# Altium PCB PCB_ProtoDuck_v1_2026-05-04.pcbdoc (part 2 of 2)
Units mm, origin at the board's own origin, x right, y up, seen from the top; angles counter-clockwise.
Board outline 75.65 x 110.65 mm, 2 copper layers (Top Layer, Bottom Layer); 76 components, 84 nets, 372 pads, 186 vias.
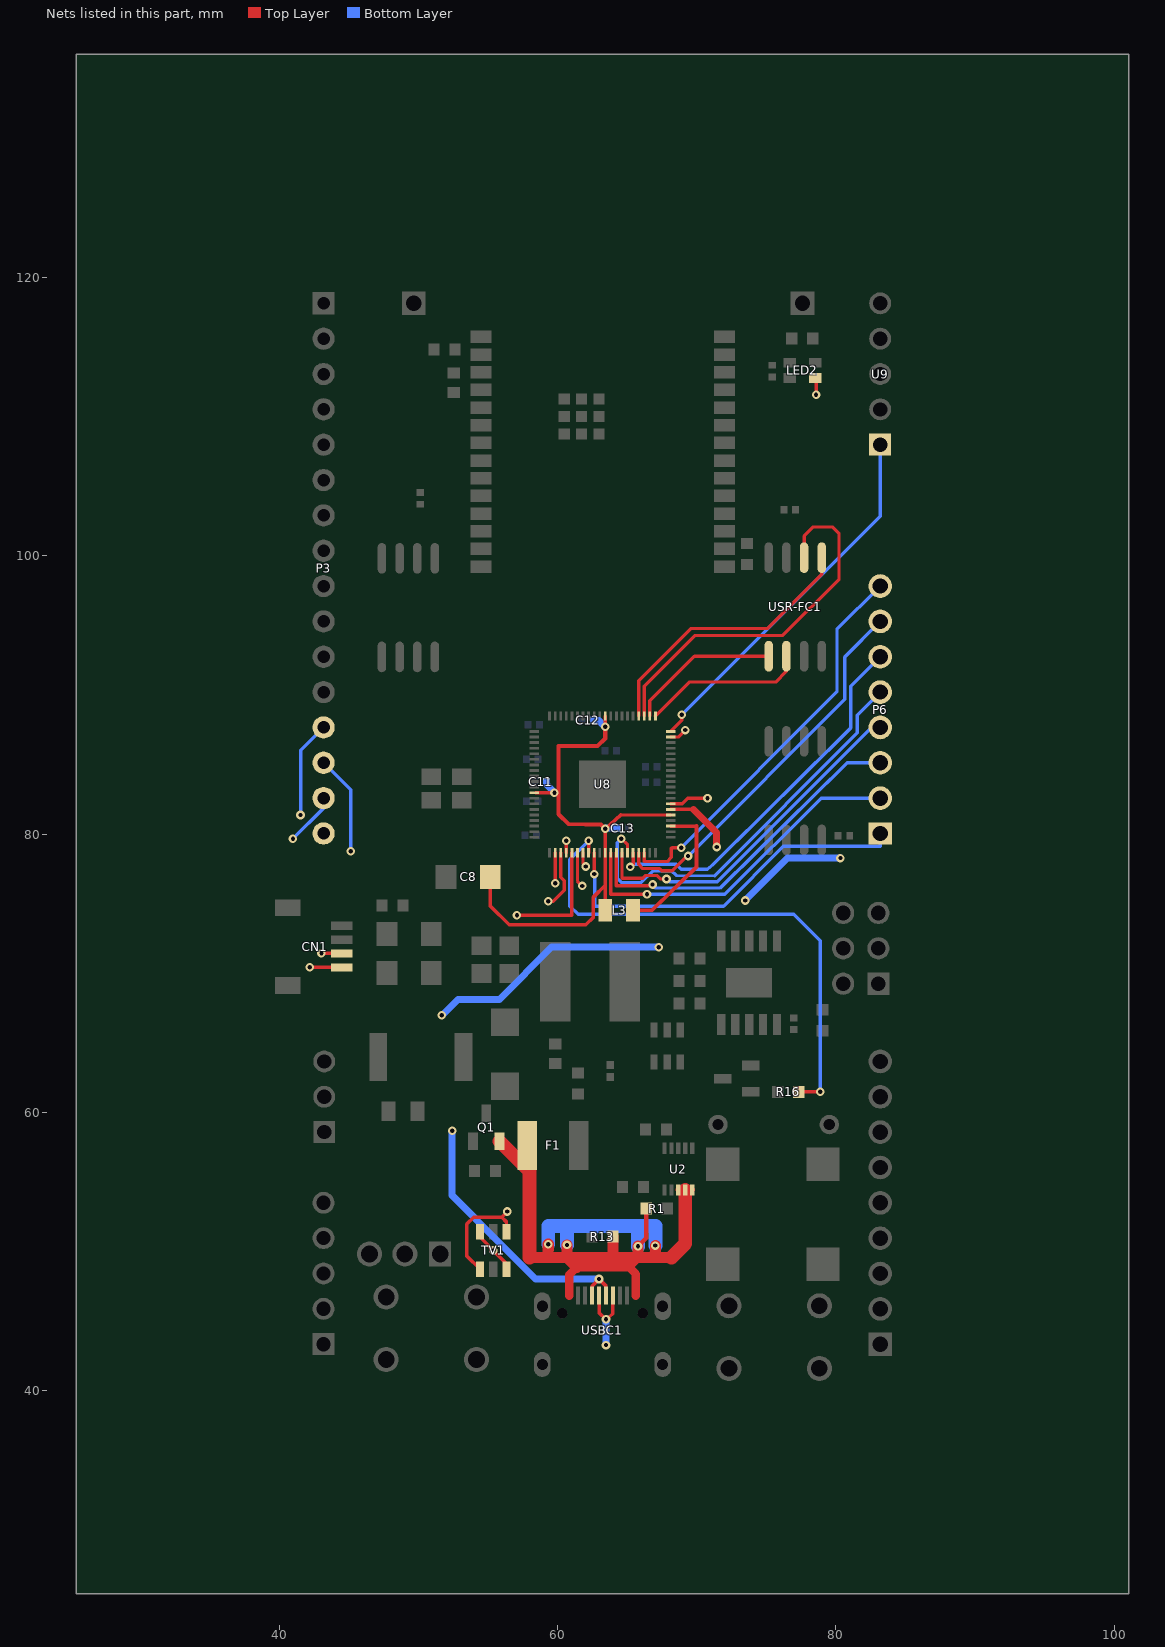
[diagram p2: the nets of this part, all layers, seen from the top]

## Via types
v1: diameter 0.62, hole 0.31, Top Layer to Bottom Layer, tented both sides, 174 vias
v2: diameter 0.5, hole 0.3, Top Layer to Bottom Layer, tented both sides, 12 vias

## Nets (pads, with @x,y where several pads share a name; then routed paths per layer and width w, separated by ;. In a path a pad name is that pad's centre, name@x,y a point inside that pad or via, vN(x,y) a via of type N, cw(c..) or ccw(c..) an arc to the next point about the centre after c; other vN are vias at no path point) (continued)
U8_42: P3.13 U8.42 | length 30.4
  Top Layer w0.24: v1(59.827,76.477) U8.42@59.827,78.669
  Mid-Layer 1 w0.24: v1(41.527,81.377) 43.627,81.378 44.958,80.047 45.207,80.047 49.877,75.377 58.127,75.377 58.727,75.977 59.327,75.977 v1(59.827,76.477)
  Bottom Layer w0.25: v1(41.527,81.377) 41.527,86.014 P3.13@43.18,87.667
U8_43: P3.14 U8.43 | length 27.3
  Top Layer w0.24: v1(59.327,75.177) 59.677,75.177 60.477,75.977 60.477,76.652 60.227,76.902 U8.43@60.227,78.669
  Mid-Layer 1 w0.24: v1@45.127,78.777 45.827,78.777 49.677,74.927 59.077,74.927 v1(59.327,75.177)
  Bottom Layer w0.25: P3.14@43.18,85.127 45.127,83.18 v1@45.127,78.777
  other v1: 45.127,78.777
U8_44: P3.15 U8.44 | length 33.7
  Top Layer w0.24: U8.44@60.627,78.669 v1(60.627,79.527)
  Mid-Layer 1 w0.24: 40.977,77.127 v1(40.977,79.677) ; 40.978,77.126 43.576,77.126 47.226,73.476 59.426,73.476 60.427,74.477 60.427,79.328 v1(60.627,79.527)
  Bottom Layer w0.25: v1(40.977,79.677) 43.18,81.88 P3.15@43.18,82.587
U8_45: P3.16 U8.45 | length 25.5
  Top Layer w0.24: v1(57.077,74.177) 61.027,74.177 61.027,75.777 U8.45@61.027,78.669
  Mid-Layer 1 w0.24: P3.16@43.18,80.047 43.18,78.972 43.18,78.83 47.828,74.177 v1(57.077,74.177)
U8_46: CN1.3 U8.46 | length 26.1
  Top Layer w0.24: v1(43.027,71.427) 44.474,71.427 CN1.3@44.483,71.418 ; U8.46@61.427,78.669 61.427,76.627 v1(61.777,76.277)
  Mid-Layer 1 w0.24: v1(43.027,71.427) 59.177,71.427 61.777,74.077 61.777,74.127 v1(61.777,76.277)
U8_47: CN1.4 U8.47 | length 29.2
  Top Layer w0.24: v1(42.177,70.427) 44.474,70.427 CN1.4@44.483,70.419 ; U8.47@61.827,78.669 61.827,77.877 v1(62.027,77.677)
  Mid-Layer 1 w0.24: v1(42.177,70.427) 58.976,70.428 62.476,73.928 62.476,76.478 62.477,76.477 61.928,76.976 61.928,77.677 v1(62.027,77.677)
U8_48: R16.2 U8.48 | length 37.5
  Top Layer w0.25: U8.48@62.227,78.669 v1(62.227,79.527) ; R16.2@77.33,61.477 v1(78.877,61.477)
  Bottom Layer w0.25: v1(62.227,79.527) 60.876,78.176 60.876,74.827 61.478,74.228 76.977,74.228 78.877,72.328 v1@78.877,61.477
U8_49: P6.1 U8.49 | length 27.1
  Top Layer w0.24: v1(62.627,77.127) U8.49@62.627,78.669
  Bottom Layer w0.24: v1@62.626,77.126 62.677,77.078 62.677,74.827 71.928,74.827 76.228,79.127 83.185,79.127 P6.1@83.185,80.047
U8_52: P6.2 U8.52 | length 25.2
  Top Layer w0.24: U8.52@63.827,78.669 63.827,75.677 v1(66.427,75.677)
  Bottom Layer w0.24: v1(66.427,75.677) 72.027,75.678 78.938,82.587 P6.2@83.185,82.587
U8_53: P6.3 U8.53 | length 25.2
  Top Layer w0.24: U8.53@64.227,78.669 64.227,76.277 66.827,76.277 v1(66.827,76.377)
  Bottom Layer w0.24: v1(66.827,76.377) v1@67.028,76.176 ; 67.028,76.128 71.676,76.128 80.828,85.127 P6.3@83.185,85.127
U8_54: P6.4 U8.54 | length 25.3
  Top Layer w0.24: U8.54@64.627,78.669 64.627,76.827 66.127,76.827 66.327,77.027 67.127,77.027 67.377,76.777 v1(67.827,76.777)
  Bottom Layer w0.24: v1(67.827,76.777) 68.027,76.577 71.477,76.577 82.567,87.667 P6.4@83.185,87.667
U8_55: P6.5 U8.55 | length 29.9
  Top Layer w0.24: v1(64.577,79.677) 65.027,79.227 U8.55@65.027,78.669
  Bottom Layer w0.24: v1@64.577,79.676 64.277,79.376 64.277,76.826 64.577,76.526 66.027,76.526 66.878,77.377 68.176,77.377 68.527,77.027 71.275,76.989 81.526,87.276 ; 81.527,87.277 81.527,88.549 P6.5@83.185,90.207
U8_56: P6.6 U8.56 | length 27.4
  Top Layer w0.24: v1@65.227,77.627 v1(65.227,77.642) 65.427,77.842 U8.56@65.427,78.669
  Bottom Layer w0.24: v1(65.227,77.642) 65.413,77.827 68.527,77.827 68.877,77.476 70.777,77.477 71.177,77.827 81.077,87.626 81.077,90.639 P6.6@83.185,92.747
U8_57: P6.7 U8.57 | length 27.6
  Top Layer w0.24: U8.57@65.827,78.669 65.827,77.827 66.127,77.527 67.327,77.527 67.477,77.377 68.227,77.377 69.277,78.427 v1(69.377,78.427)
  Bottom Layer w0.24: v1@69.378,78.426 80.627,89.676 80.627,92.729 P6.7@83.185,95.287
U8_58: P6.8 U8.58 | length 28.8
  Top Layer w0.24: 66.227,78.027 67.877,78.027 68.178,78.328 68.178,78.977 68.228,79.027 v1(68.877,79.027) ; 66.226,78.035 U8.58@66.226,78.678
  Bottom Layer w0.24: v1@68.877,79.028 80.076,90.227 80.076,94.718 P6.8@83.185,97.827
U8_63: L3.2 U8.63 | length 10.6
  Top Layer w0.24: U8.63@68.135,80.577 69.977,80.577
  Top Layer w0.27: L3.2@65.427,74.527 66.777,74.527 69.977,77.626 69.977,80.578
U8_65: C8.2 C11.1 C12.1 C13.1 L3.1 U8.10 U8.32 U8.51 U8.65 | length 42.4
  Top Layer w0.24: U8.51@63.427,78.669 v1(63.426,80.377) ; v1@63.426,87.878 U8.10@63.427,88.484 ; 64.526,81.378 U8.65@68.135,81.377
  Top Layer w0.25: C8.2@55.169,76.927 55.176,74.827 56.527,73.477 62.027,73.477 62.577,74.027 62.577,75.477 63.427,76.327 63.427,76.898 ; U8.32@58.419,82.978 v1(59.772,82.976) v1@60.077,82.975 ; L3.1@63.427,74.977 63.427,77.483 U8.51@63.427,78.677
  Top Layer w0.26: v1(63.426,80.377) 64.526,81.378
  Top Layer w0.3: v1(63.426,80.377) 63.127,80.677 60.777,80.727 60.076,81.429 60.076,86.326 62.878,86.326 63.426,86.877 v1@63.426,87.878
  Bottom Layer w0.5: C11.1@59.197,83.777 59.197,83.551 v1(59.772,82.976) ; C12.1@62.597,88.177 62.959,88.177 v1(63.426,87.71) ; v1(63.426,80.377) 63.476,80.427 C13.1@64.257,80.427
U8_79: LED2.3 U8.79 | length 37.8
  Top Layer w0.24: U8.79@68.135,86.977 68.677,86.977 v1(69.177,87.477) ; LED2.3@78.513,112.772 78.577,112.708 v1(78.577,111.577)
  Mid-Layer 1 w0.24: v1(69.177,87.477) 69.576,87.878 69.576,111.827 71.628,113.877 73.576,113.877 75.877,111.576 v1(78.577,111.577)
U8_80: U8.80 U9.1 | length 26.8
  Top Layer w0.24: U8.80@68.135,87.377 68.927,88.169 v1(68.927,88.577)
  Bottom Layer w0.24: v1(68.927,88.577) 83.185,102.835 U9.1@83.185,107.987
USBC1_A4B9: F1.1 Q1.2 R1.2 R13.2 U2.3 U2.4 U2.5 | length 61.6
  Top Layer w0.3: v1(65.776,50.377) 66.374,50.975 R1.2@66.374,53.077
  Top Layer w0.4: U2.3@68.682,54.427 U2.4@69.177,54.427 U2.5@69.677,54.427
  Top Layer w0.6: 60.828,46.834 60.828,48.327 61.377,48.876 65.128,48.876 ; 65.629,46.834 65.629,48.376 65.128,48.876 ; 65.804,49.577 65.128,48.876
  Top Layer w0.8: 57.977,49.577 60.676,49.577 ; 59.306,49.577 v1(59.327,50.527) ; v1(60.678,50.476) 60.676,49.577 ; 61.377,48.876 60.676,49.577 ; R13.2@63.98,51.077 63.98,49.655 64.058,49.577 ; v1(65.776,50.377) 65.801,49.577 ; 67.015,49.577 v1(67.028,50.428) ; 68.176,49.577 60.676,49.577
  Top Layer w1: Q1.2@55.827,57.927 57.977,55.777 ; F1.1@57.824,57.627 57.824,55.93 57.977,55.777 ; 57.977,49.577 57.977,55.777 ; 68.176,49.577 69.177,50.578 U2.4@69.177,54.427
  Bottom Layer w1: v1(59.327,50.527) 59.327,51.827 ; v1(60.678,50.476) 60.678,51.825 59.327,51.827 ; v1(65.776,50.377) 65.776,51.827 67.028,51.825 ; v1(67.028,50.428) 67.028,51.825 ; 59.327,51.827 67.028,51.825
USBC1_A6: TV1.1 TV1.4 U8.67 USBC1.A6 USBC1.B6 | length 95.2
  Top Layer w0.24: U8.67@68.135,82.177 68.948,82.177 69.348,82.577 v1(70.777,82.577)
  Top Layer w0.25: TV1.1@54.427,48.727 53.477,49.677 53.477,51.977 53.977,52.477 55.977,52.477 ; TV1.4@56.327,51.427 56.327,52.127 55.977,52.477 ; v1(56.377,52.877) 55.977,52.477 ; USBC1.A6@62.977,46.834 62.977,45.577 63.477,45.127 63.977,45.527 USBC1.B6@63.977,46.834
  Mid-Layer 1 w0.25: v1(56.377,52.877) 56.377,52.227 v1@63.477,45.127
  Mid-Layer 1 w0.5: v1(63.477,43.277) 58.277,43.277 56.927,44.627 56.927,47.327 54.527,49.727 54.527,53.977 58.477,57.927 58.477,63.377 65.777,70.677 67.827,70.677 72.377,75.227 v1(73.477,75.227) ; v1(70.777,82.577) 76.027,82.577 v1(80.327,78.277)
  Bottom Layer w0.5: v1(63.477,43.277) v1(63.477,45.127) ; v1(73.477,75.227) 76.527,78.277 v1(80.327,78.277)
USBC1_B7: TV1.3 TV1.6 U8.66 USBC1.A7 USBC1.B7 | length 82
  Top Layer w0.25: TV1.6@54.427,51.427 54.427,51.027 v1(55.377,50.077) 56.327,49.127 TV1.3@56.327,48.727 ; USBC1.B7@62.477,46.834 62.477,47.527 v1(62.977,48.027) 63.477,47.527 USBC1.A7@63.477,46.834 ; U8.66@68.135,81.777 69.777,81.777
  Top Layer w0.5: 69.777,81.777 71.427,80.127 v1(71.427,79.077)
  Mid-Layer 1 w0.25: v1(55.377,50.077) 57.027,50.077 62.877,44.227 63.927,44.227 64.477,44.777 64.477,46.527 v1(62.977,48.027)
  Mid-Layer 1 w0.5: v1(51.677,66.977) 55.127,63.527 55.127,62.227 52.427,59.527 v1@52.427,58.677 ; v1(67.277,71.877) 67.277,74.927 v1(71.427,79.077)
  Bottom Layer w0.5: v1(51.677,66.977) 52.827,68.127 55.827,68.127 59.577,71.877 v1(67.277,71.877) ; v1@52.427,58.677 52.427,54.027 55.827,50.627 58.427,48.027 v1(62.977,48.027)
  other v1: 52.427,58.677
USR-FC1_1: U8.2 USR-FC1.1 | length 11
  Top Layer w0.24: U8.2@66.627,88.484 66.627,89.577 69.835,92.785 USR-FC1.1@75.172,92.785
USR-FC1_2: U8.1 USR-FC1.2 | length 11.8
  Top Layer w0.24: U8.1@67.027,88.484 69.47,90.927 75.677,90.927 76.442,91.692 USR-FC1.2@76.442,92.785
USR-FC1_5: U8.4 USR-FC1.5 | length 20.1
  Top Layer w0.24: U8.4@65.827,88.484 65.827,91.027 69.577,94.777 75.077,94.777 78.982,98.682 USR-FC1.5@78.982,99.869
USR-FC1_6: U8.3 USR-FC1.6 | length 27.1
  Top Layer w0.24: U8.3@66.227,88.484 66.228,90.626 69.878,94.276 76.177,94.276 80.226,98.327 80.226,101.576 79.728,102.076 78.377,102.076 77.727,101.426 USR-FC1.6@77.711,99.869
pads on no net: BUZZER1.3 BUZZER1.4 LED2.1 RST.2 RST.3 TV1.5 U1.4 U1.5 U2.1 U2.10 U3.5 U6.4 U6.5 U6.6 U6.7 U6.8 U6.9 U6.10 U6.11 U6.12 U6.13 U6.14 U6.16 U6.17 U6.18 U6.19 U6.20 U6.21 U6.22 U6.23 U6.26 U6.27 USBC1. USBC1.A8 USBC1.B8 USR-FLASH.2 USR-FLASH.3
copper on no net:
  other v1: 85.977,120.927 85.877,121.277

## Polygon pours and split planes (outlines as drawn)
GND on Internal Plane 2 (split plane): 249 vertices, not listed, extent 38.227,38.227 88.227,123.227
GND on Internal Plane 2 (split plane): 95 vertices, not listed, extent 64.514,40.015 65.44,40.939
GND on Internal Plane 2 (split plane): 95 vertices, not listed, extent 61.514,40.065 62.44,40.989
GND on Internal Plane 2 (split plane): 144 vertices, not listed, extent 71.263,40.549 73.368,42.654
GND on Internal Plane 2 (split plane): 20 vertices, not listed, extent 77.864,40.651 78.365,41.152
GND on Internal Plane 2 (split plane): 19 vertices, not listed, extent 79.265,40.651 79.766,41.152
GND on Internal Plane 2 (split plane): 43 vertices, not listed, extent 59.202,40.898 59.637,41.436
GND on Internal Plane 2 (split plane): 43 vertices, not listed, extent 58.167,40.898 58.602,41.436
GND on Internal Plane 2 (split plane): 43 vertices, not listed, extent 67.852,40.898 68.287,41.436
GND on Internal Plane 2 (split plane): 43 vertices, not listed, extent 66.817,40.898 67.252,41.436
GND on Internal Plane 2 (split plane): 144 vertices, not listed, extent 46.625,41.184 48.73,43.289
GND on Internal Plane 2 (split plane): 20 vertices, not listed, extent 53.226,41.286 53.727,41.787
GND on Internal Plane 2 (split plane): 19 vertices, not listed, extent 54.627,41.286 55.128,41.787
GND on Internal Plane 2 (split plane): 19 vertices, not listed, extent 79.265,42.052 79.766,42.553
GND on Internal Plane 2 (split plane): 20 vertices, not listed, extent 77.864,42.052 78.365,42.553
GND on Internal Plane 2 (split plane): 43 vertices, not listed, extent 59.202,42.336 59.637,42.873
GND on Internal Plane 2 (split plane): 43 vertices, not listed, extent 58.167,42.336 58.602,42.873
GND on Internal Plane 2 (split plane): 43 vertices, not listed, extent 67.852,42.336 68.287,42.873
GND on Internal Plane 2 (split plane): 43 vertices, not listed, extent 66.817,42.336 67.252,42.873
GND on Internal Plane 2 (split plane): 34 vertices, not listed, extent 83.61,42.34 84.185,42.915
GND on Internal Plane 2 (split plane): 34 vertices, not listed, extent 82.185,42.34 82.76,42.915
GND on Internal Plane 2 (split plane): 121 vertices, not listed, extent 42.243,42.406 44.117,44.281
GND on Internal Plane 2 (split plane): 19 vertices, not listed, extent 54.627,42.687 55.128,43.188
GND on Internal Plane 2 (split plane): 20 vertices, not listed, extent 53.226,42.687 53.727,43.188
GND on Internal Plane 2 (split plane): 95 vertices, not listed, extent 63.014,42.815 63.939,43.739
GND on Internal Plane 2 (split plane): 34 vertices, not listed, extent 83.61,43.765 84.185,44.34
GND on Internal Plane 2 (split plane): 34 vertices, not listed, extent 82.185,43.765 82.76,44.34
GND on Internal Plane 2 (split plane): 95 vertices, not listed, extent 63.014,44.665 63.939,45.589
GND on Internal Plane 2 (split plane): 136 vertices, not listed, extent 42.24,44.944 44.12,46.824
GND on Internal Plane 2 (split plane): 20 vertices, not listed, extent 83.61,44.972 84.093,45.455
GND on Internal Plane 2 (split plane): 19 vertices, not listed, extent 82.277,44.972 82.76,45.455
GND on Internal Plane 2 (split plane): 46 vertices, not listed, extent 59.202,44.978 59.645,45.565
GND on Internal Plane 2 (split plane): 46 vertices, not listed, extent 58.159,44.978 58.602,45.565
GND on Internal Plane 2 (split plane): 46 vertices, not listed, extent 67.852,44.978 68.295,45.565
GND on Internal Plane 2 (split plane): 46 vertices, not listed, extent 66.809,44.978 67.252,45.565
GND on Internal Plane 2 (split plane): 102 vertices, not listed, extent 65.6,45.038 66.654,46.093
GND on Internal Plane 2 (split plane): 102 vertices, not listed, extent 59.8,45.038 60.855,46.093
GND on Internal Plane 2 (split plane): 144 vertices, not listed, extent 77.763,45.049 79.867,47.154
GND on Internal Plane 2 (split plane): 144 vertices, not listed, extent 71.263,45.049 73.368,47.154
GND on Internal Plane 2 (split plane): 144 vertices, not listed, extent 53.125,45.684 55.229,47.789
GND on Internal Plane 2 (split plane): 144 vertices, not listed, extent 46.625,45.684 48.73,47.789
GND on Internal Plane 2 (split plane): 20 vertices, not listed, extent 83.61,46.305 84.093,46.788
GND on Internal Plane 2 (split plane): 19 vertices, not listed, extent 82.277,46.305 82.76,46.788
GND on Internal Plane 2 (split plane): 46 vertices, not listed, extent 59.202,46.565 59.645,47.153
GND on Internal Plane 2 (split plane): 46 vertices, not listed, extent 58.159,46.565 58.602,47.153
GND on Internal Plane 2 (split plane): 46 vertices, not listed, extent 67.852,46.565 68.295,47.153
GND on Internal Plane 2 (split plane): 46 vertices, not listed, extent 66.809,46.565 67.252,47.153
GND on Internal Plane 2 (split plane): 136 vertices, not listed, extent 42.24,47.484 44.12,49.364
GND on Internal Plane 2 (split plane): 20 vertices, not listed, extent 83.61,47.512 84.093,47.995
GND on Internal Plane 2 (split plane): 19 vertices, not listed, extent 82.277,47.512 82.76,47.995
GND on Internal Plane 2 (split plane): 95 vertices, not listed, extent 62.514,47.565 63.44,48.489
GND on Internal Plane 2 (split plane): 144 vertices, not listed, extent 47.97,48.768 50.075,50.873
GND on Internal Plane 2 (split plane): 121 vertices, not listed, extent 50.625,48.771 52.499,50.871
GND on Internal Plane 2 (split plane): 20 vertices, not listed, extent 83.61,48.845 84.093,49.328
GND on Internal Plane 2 (split plane): 19 vertices, not listed, extent 82.277,48.845 82.76,49.328
GND on Internal Plane 2 (split plane): 20 vertices, not listed, extent 45.531,48.869 46.032,49.371
GND on Internal Plane 2 (split plane): 19 vertices, not listed, extent 46.932,48.87 47.433,49.371
GND on Internal Plane 2 (split plane): 95 vertices, not listed, extent 54.915,49.615 55.84,50.539
GND on Internal Plane 2 (split plane): 95 vertices, not listed, extent 65.313,49.915 66.238,50.839
GND on Internal Plane 2 (split plane): 95 vertices, not listed, extent 66.566,49.966 67.491,50.89
GND on Internal Plane 2 (split plane): 95 vertices, not listed, extent 60.216,50.014 61.141,50.938
GND on Internal Plane 2 (split plane): 136 vertices, not listed, extent 42.24,50.024 44.12,51.904
GND on Internal Plane 2 (split plane): 20 vertices, not listed, extent 83.61,50.052 84.093,50.535
GND on Internal Plane 2 (split plane): 19 vertices, not listed, extent 82.277,50.052 82.76,50.535
GND on Internal Plane 2 (split plane): 95 vertices, not listed, extent 58.864,50.065 59.789,50.989
GND on Internal Plane 2 (split plane): 19 vertices, not listed, extent 46.932,50.271 47.433,50.772
GND on Internal Plane 2 (split plane): 20 vertices, not listed, extent 45.531,50.271 46.032,50.772
GND on Internal Plane 2 (split plane): 20 vertices, not listed, extent 83.61,51.385 84.093,51.868
GND on Internal Plane 2 (split plane): 19 vertices, not listed, extent 82.277,51.385 82.76,51.868
GND on Internal Plane 2 (split plane): 95 vertices, not listed, extent 55.915,52.415 56.84,53.339
GND on Internal Plane 2 (split plane): 136 vertices, not listed, extent 42.24,52.564 44.12,54.444
GND on Internal Plane 2 (split plane): 20 vertices, not listed, extent 83.61,52.592 84.093,53.075
GND on Internal Plane 2 (split plane): 19 vertices, not listed, extent 82.277,52.592 82.76,53.075
GND on Internal Plane 2 (split plane): 95 vertices, not listed, extent 62.014,53.065 62.939,53.989
GND on Internal Plane 2 (split plane): 20 vertices, not listed, extent 83.61,53.925 84.093,54.408
GND on Internal Plane 2 (split plane): 19 vertices, not listed, extent 82.277,53.925 82.76,54.408
GND on Internal Plane 2 (split plane): 20 vertices, not listed, extent 83.61,55.132 84.093,55.615
GND on Internal Plane 2 (split plane): 19 vertices, not listed, extent 82.277,55.132 82.76,55.615
GND on Internal Plane 2 (split plane): 20 vertices, not listed, extent 83.61,56.465 84.093,56.948
GND on Internal Plane 2 (split plane): 19 vertices, not listed, extent 82.277,56.465 82.76,56.948
GND on Internal Plane 2 (split plane): 121 vertices, not listed, extent 42.29,57.646 44.164,59.521
GND on Internal Plane 2 (split plane): 20 vertices, not listed, extent 83.61,57.672 84.093,58.155
GND on Internal Plane 2 (split plane): 19 vertices, not listed, extent 82.277,57.672 82.76,58.155
GND on Internal Plane 2 (split plane): 95 vertices, not listed, extent 51.964,58.215 52.889,59.139
GND on Internal Plane 2 (split plane): 129 vertices, not listed, extent 78.674,58.274 80.379,59.979
GND on Internal Plane 2 (split plane): 129 vertices, not listed, extent 70.674,58.274 72.379,59.979
GND on Internal Plane 2 (split plane): 307 vertices, not listed, extent 68.714,58.615 69.639,62.089
GND on Internal Plane 2 (split plane): 20 vertices, not listed, extent 83.61,59.005 84.093,59.488
GND on Internal Plane 2 (split plane): 19 vertices, not listed, extent 82.277,59.005 82.76,59.488
GND on Internal Plane 2 (split plane): 136 vertices, not listed, extent 42.287,60.184 44.167,62.064
GND on Internal Plane 2 (split plane): 20 vertices, not listed, extent 83.61,60.212 84.093,60.695
GND on Internal Plane 2 (split plane): 19 vertices, not listed, extent 82.277,60.212 82.76,60.695
GND on Internal Plane 2 (split plane): 95 vertices, not listed, extent 78.414,61.015 79.339,61.939
GND on Internal Plane 2 (split plane): 20 vertices, not listed, extent 83.61,61.545 84.093,62.028
GND on Internal Plane 2 (split plane): 19 vertices, not listed, extent 82.277,61.545 82.76,62.028
GND on Internal Plane 2 (split plane): 136 vertices, not listed, extent 42.287,62.724 44.167,64.604
GND on Internal Plane 2 (split plane): 20 vertices, not listed, extent 83.61,62.752 84.093,63.235
GND on Internal Plane 2 (split plane): 19 vertices, not listed, extent 82.277,62.752 82.76,63.235
GND on Internal Plane 2 (split plane): 95 vertices, not listed, extent 61.014,63.515 61.939,64.439
GND on Internal Plane 2 (split plane): 20 vertices, not listed, extent 83.61,64.085 84.093,64.568
GND on Internal Plane 2 (split plane): 19 vertices, not listed, extent 82.277,64.085 82.76,64.568
GND on Internal Plane 2 (split plane): 95 vertices, not listed, extent 68.064,64.265 68.989,65.189
GND on Internal Plane 2 (split plane): 95 vertices, not listed, extent 58.064,64.465 58.989,65.389
GND on Internal Plane 2 (split plane): 95 vertices, not listed, extent 71.914,64.715 72.84,65.639
GND on Internal Plane 2 (split plane): 95 vertices, not listed, extent 81.033,65.465 81.958,66.389
GND on Internal Plane 2 (split plane): 95 vertices, not listed, extent 79.264,66.115 80.19,67.039
GND on Internal Plane 2 (split plane): 95 vertices, not listed, extent 66.064,66.415 66.989,67.339
GND on Internal Plane 2 (split plane): 95 vertices, not listed, extent 51.215,66.515 52.14,67.439
GND on Internal Plane 2 (split plane): 95 vertices, not listed, extent 82.664,66.565 83.589,67.489
GND on Internal Plane 2 (split plane): 95 vertices, not listed, extent 77.514,67.015 78.44,67.939
GND on Internal Plane 2 (split plane): 95 vertices, not listed, extent 75.314,67.115 76.239,68.039
GND on Internal Plane 2 (split plane): 95 vertices, not listed, extent 49.265,67.174 50.19,68.098
GND on Internal Plane 2 (split plane): 95 vertices, not listed, extent 73.314,67.265 74.239,68.189
GND on Internal Plane 2 (split plane): 95 vertices, not listed, extent 57.014,67.965 57.939,68.889
GND on Internal Plane 2 (split plane): 95 vertices, not listed, extent 48.559,68.026 49.485,68.951
GND on Internal Plane 2 (split plane): 95 vertices, not listed, extent 47.215,68.044 48.14,68.969
GND on Internal Plane 2 (split plane): 95 vertices, not listed, extent 70.864,68.165 71.79,69.089
GND on Internal Plane 2 (split plane): 137 vertices, not listed, extent 79.565,68.299 81.471,70.204
GND on Internal Plane 2 (split plane): 121 vertices, not listed, extent 82.108,68.302 84.008,70.202
GND on Internal Plane 2 (split plane): 95 vertices, not listed, extent 61.414,68.914 62.339,69.839
GND on Internal Plane 2 (split plane): 95 vertices, not listed, extent 41.714,69.965 42.64,70.889
GND on Internal Plane 2 (split plane): 137 vertices, not listed, extent 79.565,70.839 81.471,72.744
GND on Internal Plane 2 (split plane): 137 vertices, not listed, extent 82.105,70.839 84.011,72.744
GND on Internal Plane 2 (split plane): 95 vertices, not listed, extent 42.565,70.965 43.49,71.889
GND on Internal Plane 2 (split plane): 95 vertices, not listed, extent 84.714,71.215 85.639,72.139
GND on Internal Plane 2 (split plane): 95 vertices, not listed, extent 66.814,71.415 67.74,72.339
GND on Internal Plane 2 (split plane): 95 vertices, not listed, extent 57.615,71.765 58.54,72.689
GND on Internal Plane 2 (split plane): 95 vertices, not listed, extent 76.204,71.854 77.129,72.779
GND on Internal Plane 2 (split plane): 95 vertices, not listed, extent 41.964,71.965 42.889,72.889
GND on Internal Plane 2 (split plane): 137 vertices, not listed, extent 79.565,73.379 81.471,75.284
GND on Internal Plane 2 (split plane): 137 vertices, not listed, extent 82.105,73.379 84.011,75.284
GND on Internal Plane 2 (split plane): 95 vertices, not listed, extent 56.615,73.715 57.54,74.639
GND on Internal Plane 2 (split plane): 95 vertices, not listed, extent 58.864,74.715 59.79,75.639
GND on Internal Plane 2 (split plane): 95 vertices, not listed, extent 73.014,74.765 73.939,75.689
GND on Internal Plane 2 (split plane): 161 vertices, not listed, extent 65.964,75.215 67.289,76.839
GND on Internal Plane 2 (split plane): 95 vertices, not listed, extent 61.314,75.815 62.239,76.739
GND on Internal Plane 2 (split plane): 95 vertices, not listed, extent 59.364,76.015 60.289,76.939
GND on Internal Plane 2 (split plane): 95 vertices, not listed, extent 67.364,76.315 68.289,77.239
GND on Internal Plane 2 (split plane): 161 vertices, not listed, extent 61.564,76.665 63.09,78.139
GND on Internal Plane 2 (split plane): 95 vertices, not listed, extent 64.764,77.18 65.69,78.104
GND on Internal Plane 2 (split plane): 95 vertices, not listed, extent 79.864,77.815 80.79,78.739
GND on Internal Plane 2 (split plane): 157 vertices, not listed, extent 68.414,77.965 69.84,79.489
GND on Internal Plane 2 (split plane): 95 vertices, not listed, extent 56.565,78.065 57.49,78.989
GND on Internal Plane 2 (split plane): 95 vertices, not listed, extent 44.664,78.315 45.589,79.239
GND on Internal Plane 2 (split plane): 95 vertices, not listed, extent 57.864,78.565 58.79,79.489
GND on Internal Plane 2 (split plane): 95 vertices, not listed, extent 70.964,78.614 71.889,79.539
GND on Internal Plane 2 (split plane): 95 vertices, not listed, extent 51.714,78.865 52.639,79.789
GND on Internal Plane 2 (split plane): 95 vertices, not listed, extent 55.964,78.865 56.889,79.789
GND on Internal Plane 2 (split plane): 95 vertices, not listed, extent 61.764,79.065 62.69,79.989
GND on Internal Plane 2 (split plane): 95 vertices, not listed, extent 60.164,79.065 61.09,79.989
GND on Internal Plane 2 (split plane): 137 vertices, not listed, extent 42.227,79.094 44.133,80.999
GND on Internal Plane 2 (split plane): 121 vertices, not listed, extent 82.185,79.109 84.185,80.984
GND on Internal Plane 2 (split plane): 95 vertices, not listed, extent 58.964,79.115 59.889,80.039
GND on Internal Plane 2 (split plane): 95 vertices, not listed, extent 40.514,79.215 41.44,80.139
GND on Internal Plane 2 (split plane): 95 vertices, not listed, extent 64.114,79.215 65.04,80.139
GND on Internal Plane 2 (split plane): 95 vertices, not listed, extent 65.614,79.315 66.539,80.239
GND on Internal Plane 2 (split plane): 95 vertices, not listed, extent 60.964,79.614 61.889,80.539
GND on Internal Plane 2 (split plane): 95 vertices, not listed, extent 62.964,79.915 63.889,80.839
GND on Internal Plane 2 (split plane): 177 vertices, not listed, extent 54.764,80.015 55.74,81.839
GND on Internal Plane 2 (split plane): 95 vertices, not listed, extent 58.664,80.515 59.589,81.439
GND on Internal Plane 2 (split plane): 95 vertices, not listed, extent 79.364,80.914 80.289,81.839
GND on Internal Plane 2 (split plane): 95 vertices, not listed, extent 41.064,80.914 41.99,81.839
GND on Internal Plane 2 (split plane): 140 vertices, not listed, extent 82.183,81.584 84.188,83.589
GND on Internal Plane 2 (split plane): 137 vertices, not listed, extent 42.227,81.634 44.133,83.539
GND on Internal Plane 2 (split plane): 173 vertices, not listed, extent 58.664,81.914 60.234,83.438
GND on Internal Plane 2 (split plane): 95 vertices, not listed, extent 54.615,82.015 55.54,82.939
GND on Internal Plane 2 (split plane): 95 vertices, not listed, extent 70.314,82.115 71.239,83.039
GND on Internal Plane 2 (split plane): 95 vertices, not listed, extent 56.014,82.115 56.939,83.039
GND on Internal Plane 2 (split plane): 95 vertices, not listed, extent 66.114,82.315 67.04,83.239
GND on Internal Plane 2 (split plane): 95 vertices, not listed, extent 56.565,83.914 57.49,84.839
GND on Internal Plane 2 (split plane): 140 vertices, not listed, extent 82.183,84.124 84.188,86.129
GND on Internal Plane 2 (split plane): 137 vertices, not listed, extent 42.227,84.174 44.133,86.079
GND on Internal Plane 2 (split plane): 95 vertices, not listed, extent 66.478,85.201 67.403,86.126
GND on Internal Plane 2 (split plane): 317 vertices, not listed, extent 55.368,85.461 57.44,88.339
GND on Internal Plane 2 (split plane): 95 vertices, not listed, extent 66.664,86.115 67.589,87.039
GND on Internal Plane 2 (split plane): 95 vertices, not listed, extent 53.064,86.264 53.99,87.189
GND on Internal Plane 2 (split plane): 95 vertices, not listed, extent 61.164,86.565 62.09,87.489
GND on Internal Plane 2 (split plane): 140 vertices, not listed, extent 82.183,86.664 84.188,88.669
GND on Internal Plane 2 (split plane): 137 vertices, not listed, extent 42.227,86.714 44.133,88.619
GND on Internal Plane 2 (split plane): 95 vertices, not listed, extent 64.964,86.795 65.889,87.72
GND on Internal Plane 2 (split plane): 241 vertices, not listed, extent 62.164,86.865 64.69,88.172
GND on Internal Plane 2 (split plane): 95 vertices, not listed, extent 68.714,87.015 69.639,87.939
GND on Internal Plane 2 (split plane): 95 vertices, not listed, extent 58.764,87.215 59.69,88.139
GND on Internal Plane 2 (split plane): 95 vertices, not listed, extent 70.214,87.914 71.14,88.839
GND on Internal Plane 2 (split plane): 95 vertices, not listed, extent 68.464,88.115 69.39,89.039
GND on Internal Plane 2 (split plane): 95 vertices, not listed, extent 56.114,88.657 57.04,89.582
GND on Internal Plane 2 (split plane): 140 vertices, not listed, extent 82.183,89.204 84.188,91.209
GND on Internal Plane 2 (split plane): 137 vertices, not listed, extent 42.227,89.254 44.133,91.159
GND on Internal Plane 2 (split plane): 95 vertices, not listed, extent 63.314,89.264 64.239,90.189
GND on Internal Plane 2 (split plane): 95 vertices, not listed, extent 58.814,89.315 59.74,90.239
GND on Internal Plane 2 (split plane): 381 vertices, not listed, extent 60.164,89.914 64.189,91.54
GND on Internal Plane 2 (split plane): 95 vertices, not listed, extent 58.064,89.964 58.989,90.889
GND on Internal Plane 2 (split plane): 95 vertices, not listed, extent 57.114,89.972 58.04,90.897
GND on Internal Plane 2 (split plane): 140 vertices, not listed, extent 82.183,91.744 84.188,93.749
GND on Internal Plane 2 (split plane): 137 vertices, not listed, extent 42.227,91.794 44.133,93.699
GND on Internal Plane 2 (split plane): 95 vertices, not listed, extent 65.764,92.614 66.69,93.539
GND on Internal Plane 2 (split plane): 95 vertices, not listed, extent 59.064,92.665 59.989,93.589
GND on Internal Plane 2 (split plane): 95 vertices, not listed, extent 64.964,93.215 65.889,94.139
GND on Internal Plane 2 (split plane): 95 vertices, not listed, extent 62.714,93.515 63.639,94.439
GND on Internal Plane 2 (split plane): 95 vertices, not listed, extent 47.915,94.015 48.84,94.939
GND on Internal Plane 2 (split plane): 140 vertices, not listed, extent 82.183,94.284 84.188,96.289
GND on Internal Plane 2 (split plane): 137 vertices, not listed, extent 42.227,94.334 44.133,96.239
GND on Internal Plane 2 (split plane): 95 vertices, not listed, extent 44.464,94.665 45.39,95.589
GND on Internal Plane 2 (split plane): 95 vertices, not listed, extent 78.464,94.865 79.39,95.789
GND on Internal Plane 2 (split plane): 95 vertices, not listed, extent 72.314,94.914 73.239,95.839
GND on Internal Plane 2 (split plane): 140 vertices, not listed, extent 82.183,96.824 84.188,98.829
GND on Internal Plane 2 (split plane): 137 vertices, not listed, extent 42.227,96.874 44.133,98.779
GND on Internal Plane 2 (split plane): 95 vertices, not listed, extent 58.014,98.115 58.939,99.039
GND on Internal Plane 2 (split plane): 95 vertices, not listed, extent 65.421,98.642 66.346,99.567
GND on Internal Plane 2 (split plane): 137 vertices, not listed, extent 42.227,99.414 44.133,101.319
GND on Internal Plane 2 (split plane): 95 vertices, not listed, extent 40.265,99.415 41.19,100.339
GND on Internal Plane 2 (split plane): 137 vertices, not listed, extent 42.227,101.954 44.133,103.859
GND on Internal Plane 2 (split plane): 95 vertices, not listed, extent 73.164,102.365 74.089,103.289
GND on Internal Plane 2 (split plane): 137 vertices, not listed, extent 42.227,104.494 44.133,106.399
GND on Internal Plane 2 (split plane): 137 vertices, not listed, extent 42.227,107.034 44.133,108.939
GND on Internal Plane 2 (split plane): 121 vertices, not listed, extent 82.247,107.049 84.122,108.924
GND on Internal Plane 2 (split plane): 137 vertices, not listed, extent 42.227,109.574 44.133,111.479
GND on Internal Plane 2 (split plane): 136 vertices, not listed, extent 82.245,109.587 84.125,111.467
GND on Internal Plane 2 (split plane): 95 vertices, not listed, extent 70.214,110.065 71.14,110.989
GND on Internal Plane 2 (split plane): 95 vertices, not listed, extent 58.271,110.142 59.196,111.067
GND on Internal Plane 2 (split plane): 95 vertices, not listed, extent 57.121,110.942 58.046,111.867
GND on Internal Plane 2 (split plane): 95 vertices, not listed, extent 78.114,111.115 79.039,112.039
GND on Internal Plane 2 (split plane): 95 vertices, not listed, extent 68.021,111.442 68.946,112.367
GND on Internal Plane 2 (split plane): 137 vertices, not listed, extent 42.227,112.114 44.133,114.019
GND on Internal Plane 2 (split plane): 136 vertices, not listed, extent 82.245,112.127 84.125,114.007
GND on Internal Plane 2 (split plane): 95 vertices, not listed, extent 47.964,113.765 48.889,114.689
GND on Internal Plane 2 (split plane): 95 vertices, not listed, extent 74.714,114.115 75.639,115.039
GND on Internal Plane 2 (split plane): 137 vertices, not listed, extent 42.227,114.654 44.133,116.559
GND on Internal Plane 2 (split plane): 136 vertices, not listed, extent 82.245,114.667 84.125,116.547
GND on Internal Plane 2 (split plane): 121 vertices, not listed, extent 48.657,117.147 50.657,119.147
GND on Internal Plane 2 (split plane): 121 vertices, not listed, extent 76.597,117.147 78.597,119.147
GND on Internal Plane 2 (split plane): 121 vertices, not listed, extent 42.23,117.197 44.13,119.097
GND on Internal Plane 2 (split plane): 136 vertices, not listed, extent 82.245,117.207 84.125,119.087
GND on Internal Plane 2 (split plane): 121 vertices, not listed, extent 85.414,120.465 86.44,121.739

## Keep-outs
Keep-Out Layer:
  lines w0.254: 38.227,41.227 ccw(c41.227,41.227) 41.227,38.227 ; 38.227,120.227 cw(c41.227,120.227) 41.227,123.227 ; 85.227,38.227 ccw(c85.227,41.227) 88.227,41.227 ; 85.227,123.227 cw(c85.227,120.227) 88.227,120.227

## Other copper
Top Layer:
  region net GND: 60.478,111.262 60.478,108.762 62.978,108.762 62.978,111.262
  rectangle: 60.477,111.227 62.977,111.277
  rectangle: 60.477,108.727 62.977,111.227
  rectangle: 60.477,108.727 62.977,111.227

## Silkscreen, mask and mechanical layers (free items; w line width, h text height)
Top Overlay:
  lines w0.254: 87.748,77.777 79.227,77.777 79.227,67.952 87.748,67.952 87.748,77.777 ; 87.748,77.777 76.977,77.777 76.977,67.977 87.748,67.977 87.748,77.777 ; 39.027,41.837 44.43,41.837 44.43,55.027 39.027,55.027 39.027,41.837 ; 39.027,57.077 44.477,57.077 44.477,65.177 39.027,65.177 39.027,57.077 ; 40.077,66.427 44.327,66.427 44.327,74.927 40.077,74.927 40.077,66.427 ; 46.223,58.68 51.43,58.68 51.43,61.474 46.223,61.474 46.223,58.68 ; 54.227,94.427 72.227,94.427 72.227,97.627 54.227,97.627 54.227,94.427 ; 54.727,90.627 69.077,90.627 69.077,93.127 54.727,93.127 54.727,90.627 ; 57.377,90.627 71.877,90.627 71.877,93.127 57.377,93.127 57.377,90.627 ; 57.477,76.227 68.927,76.227 68.927,89.377 57.477,89.377 57.477,76.227 ; 79.227,67.977 87.727,67.977 87.727,75.627 79.227,75.627 79.227,67.977 ; 81.935,41.845 87.127,41.845 87.127,65.177 81.935,65.177 81.935,41.845
  text "D16" at 85.177,117.127 h1
  text "D0" at 39.777,117.077 h1
  text "D17" at 85.177,114.587 h1
  text "D1" at 39.777,114.526 h1
  text "D18" at 85.177,112.047 h1
  text "D2" at 39.777,111.977 h1
  text "D19" at 85.177,109.507 h1
  text "D3" at 39.777,109.437 h1
  text "D20" at 85.177,106.967 h1
  text "D4" at 39.777,106.897 h1
  text "D5" at 39.777,104.357 h1
  text "D6" at 39.777,101.817 h1
  text "D7" at 39.777,99.277 h1
  text "A0" at 85.177,96.807 h1
  text "D8" at 39.777,96.737 h1
  text "ESP32-C6" at 59.477,95.077 h1
  text "A1" at 85.644,94.588 h1 r69
  text "D9" at 39.777,94.197 h1
  text "A2" at 85.177,91.727 h1
  text "D10" at 39.277,91.677 h1
  text "v1" at 69.846,90.36 h1.5 r17
  text "ProtoDuck" at 57.927,90.277 h1.5
  text "A3" at 85.177,89.187 h1
  text "D11" at 39.277,89.137 h1
  text "A4" at 85.177,86.647 h1
  text "D12" at 39.277,86.597 h1
  text "A5" at 85.177,84.107 h1
  text "D13" at 39.277,84.057 h1
  text "A6" at 85.177,81.567 h1
  text "D14" at 39.277,81.517 h1
  text "A7" at 85.177,79.027 h1
  text "D15" at 39.277,78.977 h1
  text "RP2350B" at 60.027,76.227 h1
  text "N/A-9V" at 80.662,75.578 h1 r4
  text "12V" at 84.827,73.327 h1
  text "20V" at 84.827,70.787 h1
  text "PWR-SEL" at 79.127,69.577 h1 r90
  text "5V" at 84.827,68.247 h1
  text "I2C" at 41.377,66.627 h1
  text "VBUS" at 40.027,62.977 h1 r270
  text "PROT" at 38.777,62.827 h1 r270
  text "GND" at 86.777,52.127 h1 r90
  text "GND" at 47.487,51.677 h1 r90
  text "SWDIO" at 50.027,51.677 h1 r90
  text "SWCLK" at 52.567,51.677 h1 r90
  text "+3.3V" at 39.377,50.477 h1 r270
Bottom Overlay:
  lines w0.254: 57.027,73.727 69.327,73.727 69.327,89.777 57.027,89.777 57.027,73.727
  lines w0.5: 44.927,45.477 81.377,45.477 81.377,50.227 44.927,50.227 44.927,45.477 ; 44.927,50.177 81.377,50.177 81.377,72.677 44.927,72.677 44.927,50.177 ; 44.927,63.327 81.377,63.327 81.377,72.627 44.927,72.627 44.927,63.327
  text "DC Cap" at 65.462,73.978 h1 r4
  text "Hi, Thanks for using the board," at 79.877,60.426 h1.5
  text "you can scan the above QR" at 79.864,58.727 h1.5 r359
  text "code to visit the tutorial and" at 80.027,56.576 h1.5
  text "support page to learn how to" at 80.027,54.577 h1.5
  text "use the device or download the" at 80.027,52.527 h1.5
  text "software files" at 80.077,50.477 h1.5
  text "SETUP GUIDE" at 75.177,45.427 h2.5

## Text inside footprints (layer, text, board x,y; h text height)
BUZZER1: Top Overlay "+" at 77.195,55.896 h2.03 r135